# Altium PCB UCC28180_Power Board.PcbDoc
Units mil, origin at the board's own origin, x right, y up, seen from the top; angles counter-clockwise.
Board outline 5050 x 3020 mil, 4 copper layers (Top Layer, Signal Layer 1, Signal Layer 2, Bottom Layer), stack 33.434 mil thick; 57 components, 26 nets, 130 pads, 64 vias.
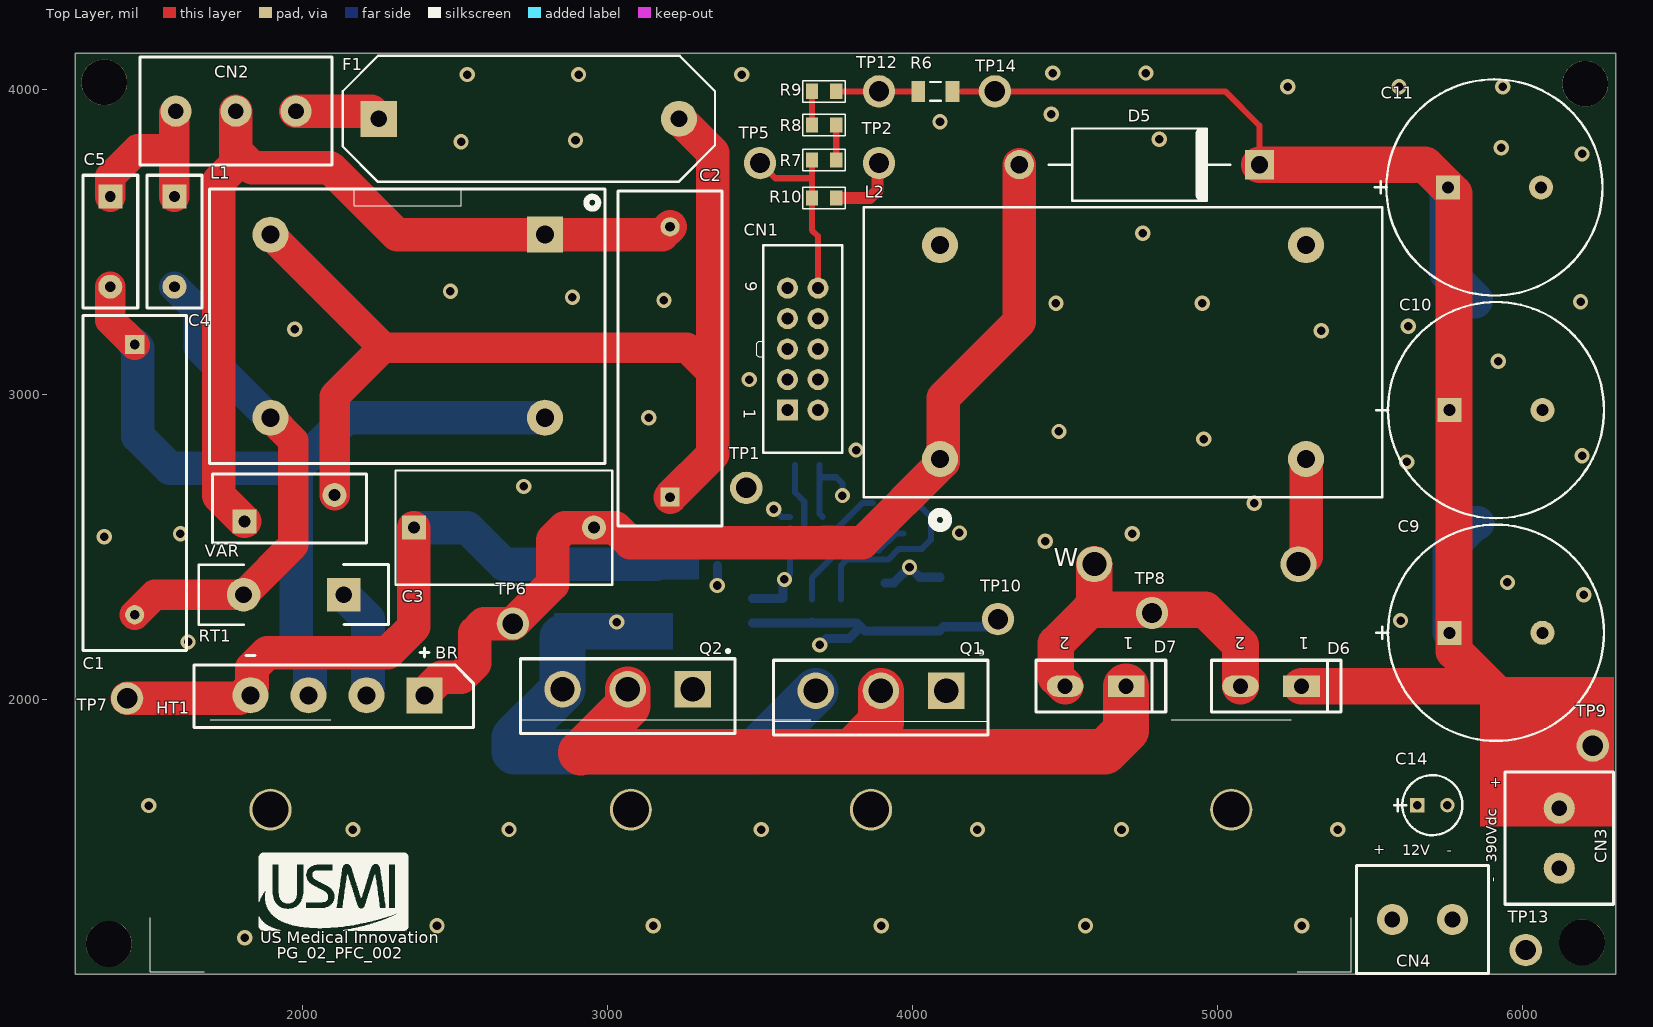
[diagram p0: Top Layer view]
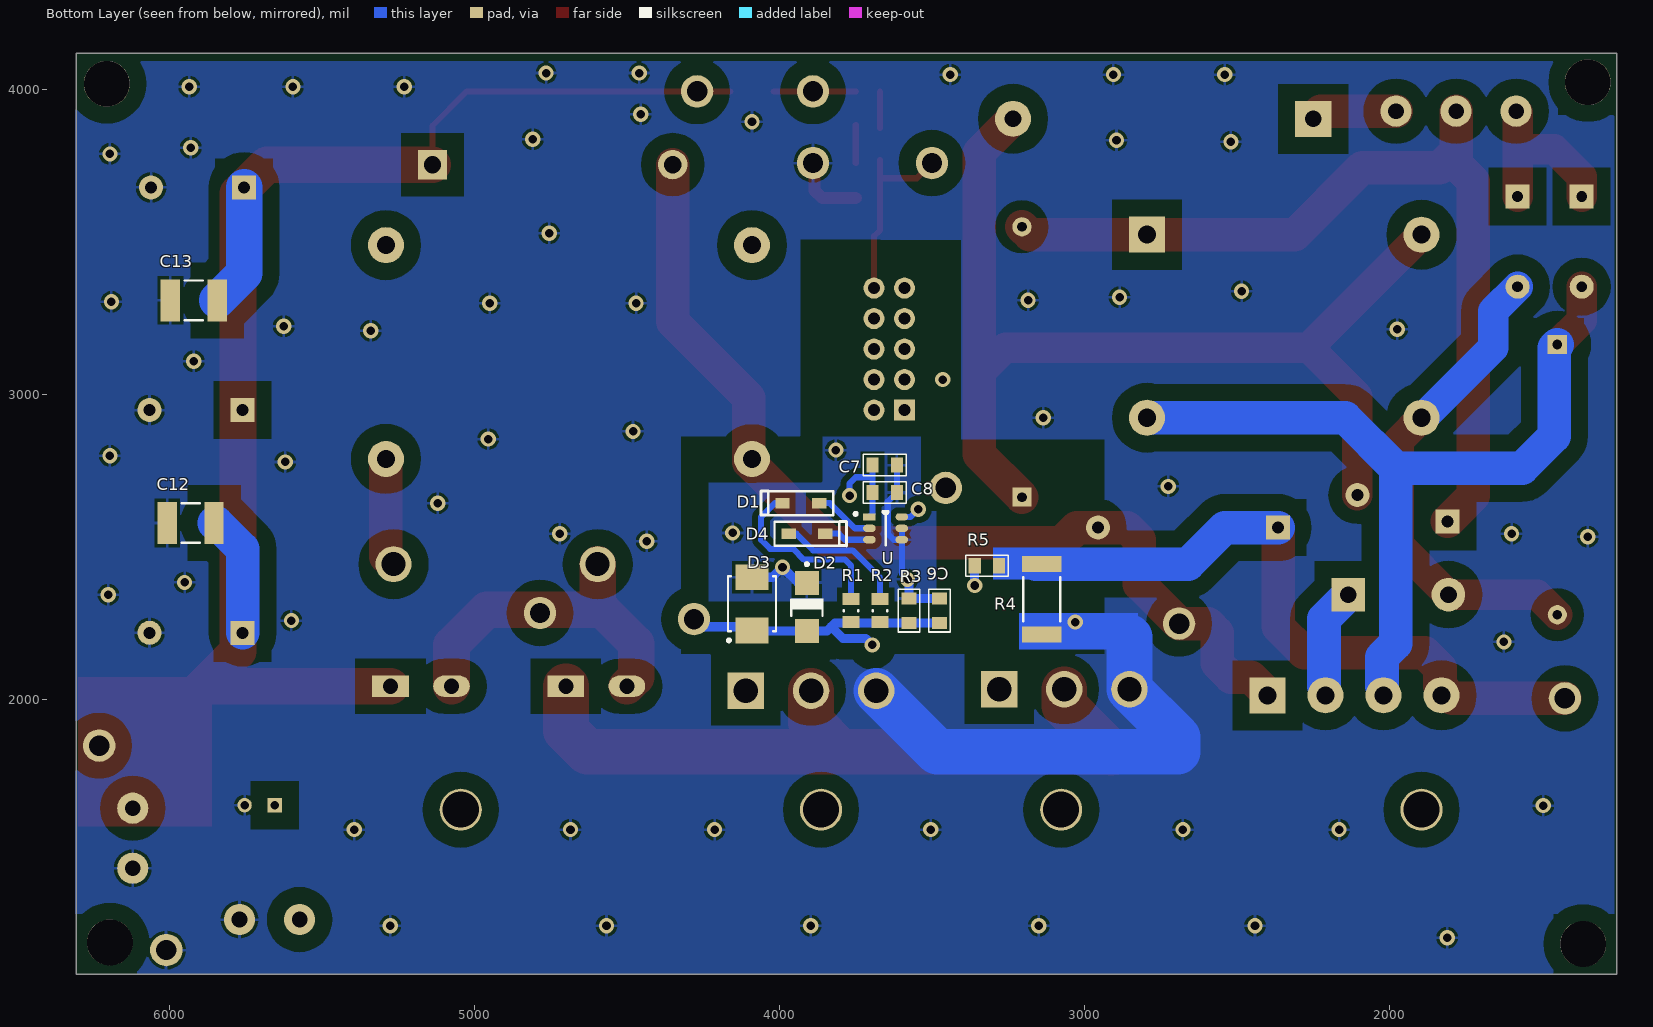
[diagram p1: Bottom Layer view, seen from below]
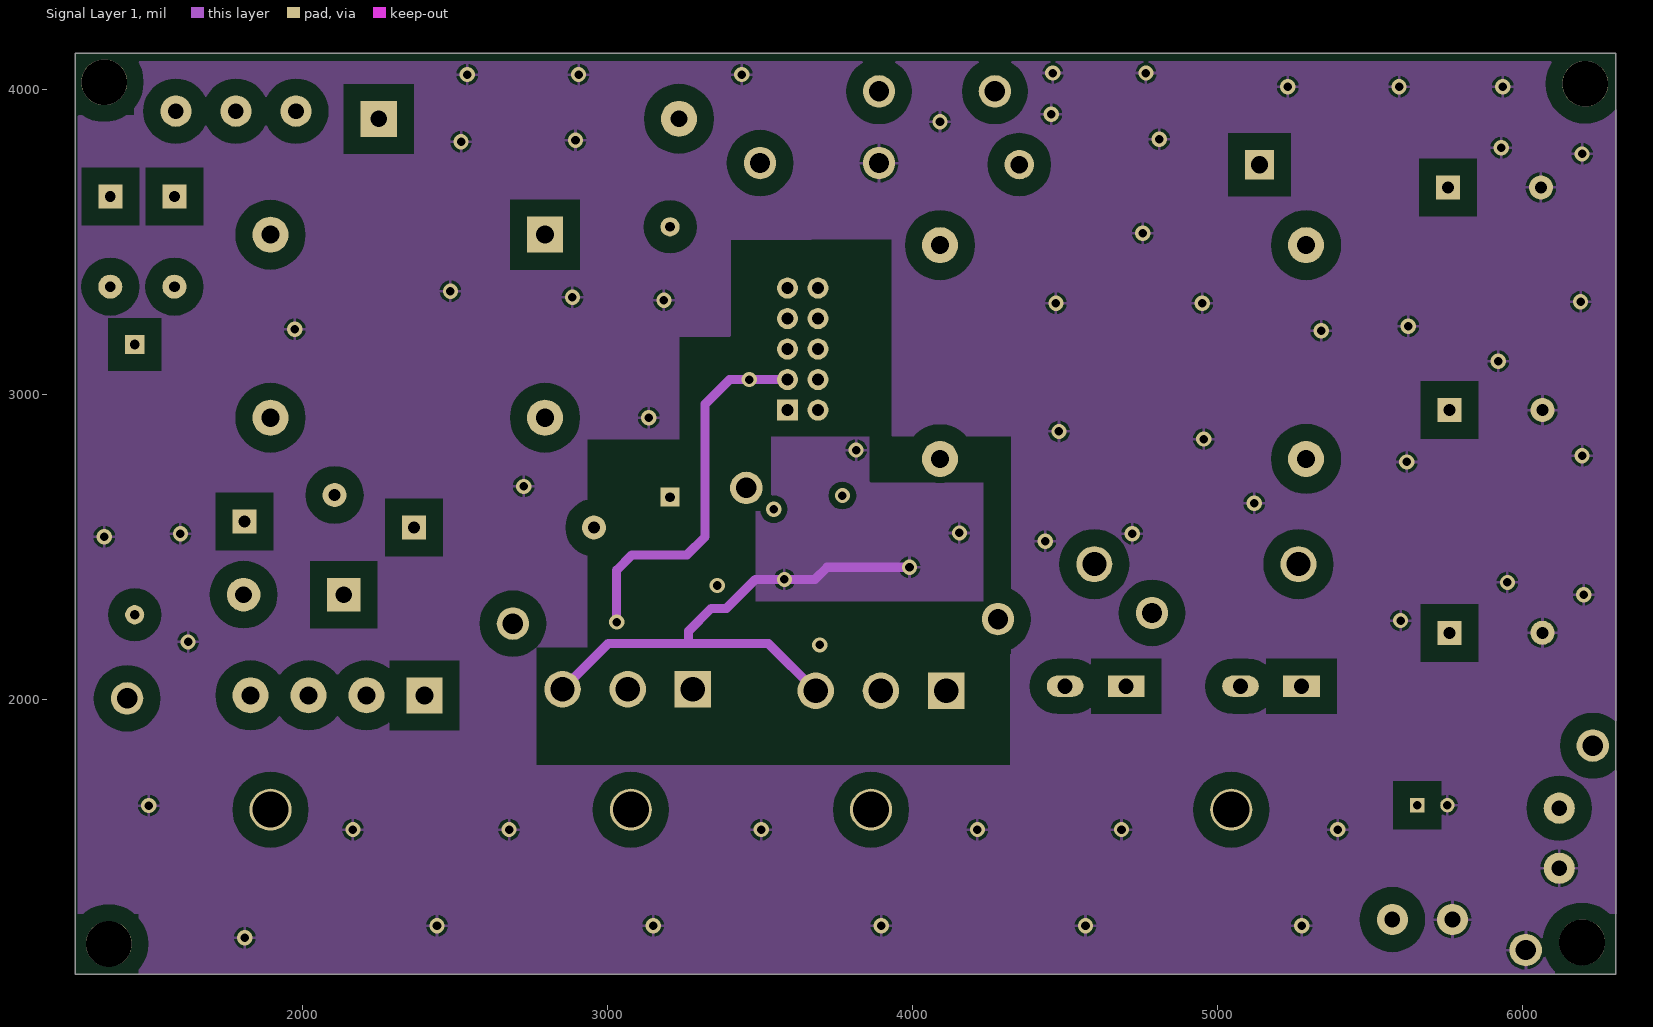
[diagram p2: Signal Layer 1]
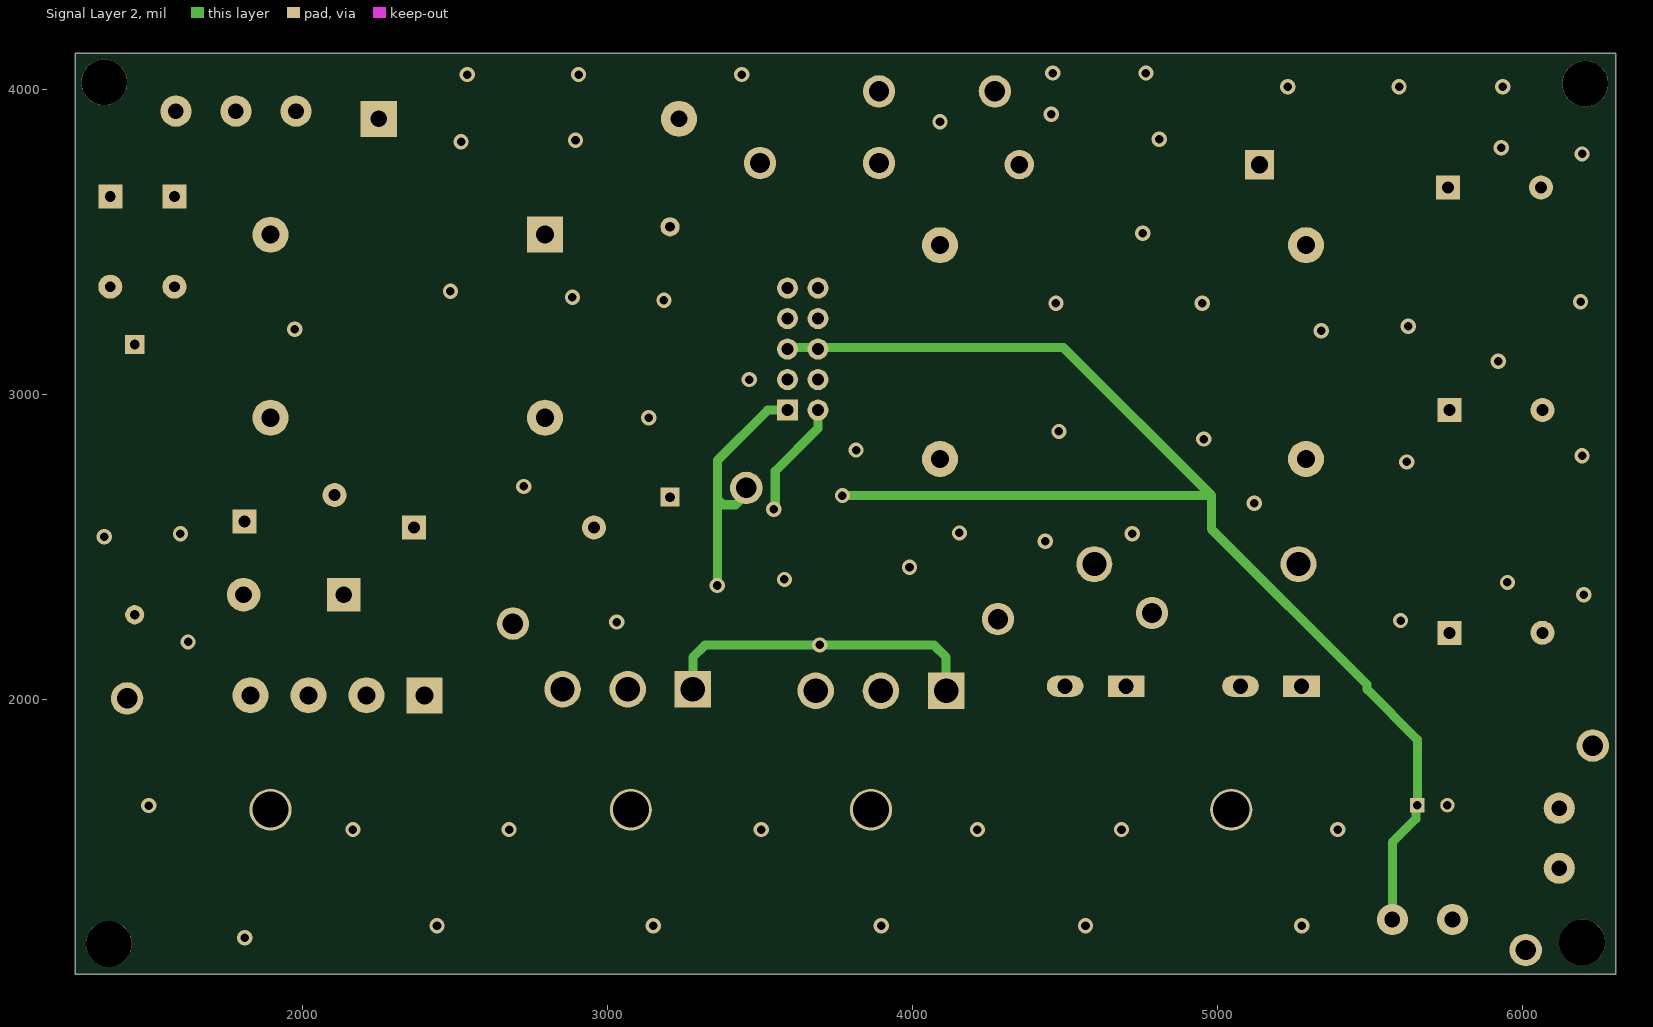
[diagram p3: Signal Layer 2]

## Layer stack, top to bottom
Top Solder: solder mask 0.4, Solder Resist, Dk 3.5
Top Layer: signal copper 2.8
Dielectric 1: core 10, FR-4, Dk 4.2
Signal Layer 1: signal copper 1.417
Dielectric 3: prepreg 5, Dk 4.2
Signal Layer 2: signal copper 1.417
Dielectric 2: core 10, Dk 4.2
Bottom Layer: signal copper 2.8
Bottom Solder: solder mask 0.4, Solder Resist, Dk 3.5

## Board outline
1255,1100 6305,1100 6305,4120 1255,4120

## Design rules (kind name [scope] priority, off if disabled: settings)
Clearance Clearance_3 [InNamedPolygon('GND_L02_P011')] p1: gap=20
Clearance Clearance_2 [InNamedPolygon('Bottom layer-GND3')] p2: gap=20
Clearance [InNamedPolygon('Bottom layer-GND3')] p3: gap=10
Clearance Clearance_1 [All] p4: gap=10 except(55: Arc-Poly Track-Poly SMDPad-Poly THPad-Poly Via-Poly Fill-Poly Poly-Poly)
Clearance "Clearance 2" [All] p5: gap=10 except(20: Arc-Poly Track-Poly SMDPad-Poly THPad-Poly Via-Poly Fill-Poly Poly-Poly)
ComponentClearance [All] p1 off: gap=10 collisioncheckmode=3 verticalgap=10 showdistances=FALSE
PolygonConnect [All] p1: connectstyle=Relief reliefconductorwidth=10 reliefentries=4 polygonreliefangle="90 Angle" airgapwidth=10
RoutingVias [All] p1: holewidth=28 width=50 viastyle="Through Hole" minholewidth=28 minwidth=50 maxholewidth=28 maxwidth=50
SolderMaskExpansion [All] p1: expansion=4
Width [All] p1: maxlimit=300 minlimit=10 preferedwidth=10
29 further rules are at their usual default settings.

## Classes and differential pairs
component class "Boosting Stage": C9 C10 C11 C12 C13 C14 CN3 CN4 D5 D6 D7 HT1 L2 Q1 Q2 R4 R5 R6 R7 R8 R9 R10 TP8 TP9 TP10 TP12 TP13 TP14 W
component class "Driving Stage": C6 C7 C8 D1 D2 D3 D4 R1 R2 R3 U
component class "Filtering Stage": BR C1 C2 C3 C4 C5 CN2 F1 L1 RT1 TP6 TP7 VAR
component class "Top Sheet_Power System": CN1 TP1 TP2 TP5

## Components (designator, comment, footprint, x,y, rotation, side; value= is the part's Value field where it differs from the comment)
BR "GBU8J-BP" GBU8J 2400,2015 r180 top (schematic designator BR1)
C1 "ECQ-U2A474ML" ECQ-U2A474ML 1450,3165 r270 top
C2 "ECQ-U2A474ML" ECQ-U2A474ML 3205,2665 r90 top
C3 "ECQ-U2A334ML" CAPFILM0.33U 2365,2565 r0 top
C4 "CS11-E2GA222MYNS" CS11-E2GA222MYNS 1580,3650 r270 top
C5 "CS11-E2GA222MYNS" CS11-E2GA222MYNS 1370,3650 r270 top
C6 "C0805C102J5GACTU" CAP0805_NEW 3475,2292.6 r270 bottom (schematic designator C1)
C7 "CC0805JKX7R9BB105" CAP0805_NEW 3655,2770 r0 bottom (schematic designator C2)
C8 "C0805C104J5RACAUTO" CAP0805_NEW 3655,2680 r0 bottom (schematic designator C3)
C9 "450QXW120MEFC18X31.5" 450QXW120MEFC18X31.5 5760,2220 r0 top (schematic designator C6)
C10 "450QXW120MEFC18X31.5" 450QXW120MEFC18X31.5 5760,2950 r0 top locked (schematic designator C7)
C11 "450QXW120MEFC18X31.5" 450QXW120MEFC18X31.5 5755,3680 r0 top (schematic designator C8)
C12 "GRM43DR72J104KW01L" CAP1812 5930,2580 r180 bottom (schematic designator C9)
C13 "GRM43DR72J104KW01L" CAP1812 5920,3310 r180 bottom (schematic designator C11)
C14 "ECA-1VM470" CAPALUM47U 5655,1655 r0 top (schematic designator C10)
CN1 "MSPV10-ND" MSV10-ND 3640,3150 r270 top
CN2 "1935789" CONN_1935789 1585,3930 r0 top
CN3 "1935776" CONN_1935776 6120,1645 r270 top
CN4 "1935776" CONN_1935776 5770,1280 r180 top
D1 "DB2W40300L" Mini2-F3-B 3930,2645 r0 bottom
D2 "1SMA12CAT3G" ONSC-SMA-2-403D-02_F_V 3910,2305 r270 bottom
D3 "1SMB5927BT3G" ONSC-SMB-2-403A-03_H_V 4090,2315 r90 bottom
D4 "DB2W40300L" Mini2-F3-B 3910,2545 r180 bottom
D5 "1N5406RLG" 1N5406-DO201AD 4350,3755 r0 top (schematic designator D1)
D6 "C3D04060A" C3D04060A 5275,2045 r180 top (schematic designator D2)
D7 "C3D04060A" C3D04060A 4700,2045 r180 top locked (schematic designator D3)
F1 "FUSE" 0031.8211 2250,3905 r0 top
HT1 "HT_78245" HT-78245 3470,1640 r0 top
L1 "8113-RC" 8113-RC 2345,3225 r180 top
L2 "51-1785LF" G-51-185LF 4090,2790 r0 top
Q1 "C3M0065090D" TO-247-3 4110,2030 r180 top
Q2 "C3M0065090D" TO-247-3 3280,2035 r180 top
R1 "CRCW0805R10" RES0805 3765,2292.6 r90 bottom
R2 "CRCW0805R4.99" RES0805 3670,2292.6 r90 bottom
R3 "TNPW080510K0FEEA" RES0805_New 3575,2292.6 r90 bottom
R4 "CRCW2512R0.027" RES2512 3140,2330 r90 bottom (schematic designator R1)
R5 "RC0805FR-07221RL" RES0805_New 3320,2440 r0 bottom (schematic designator R2)
R6 "CRCW120649R9FKEA" RES1206 4075,3995 r180 top (schematic designator R3)
R7 "CRCW0805340KFKEA" RES0805_New 3710,3770 r180 top (schematic designator R4)
R8 "CRCW0805332KFKEA" RES0805_New 3710,3885 r0 top (schematic designator R5)
R9 "CRCW0805332KFKEA" RES0805_New 3710,3995 r180 top (schematic designator R6)
R10 "RC0805FR-0713KL" RES0805_New 3710,3645 r0 top (schematic designator R7)
RT1 "CL-40" CL-40 2135,2345 r180 top
TP1 "5006" "Test Point" 3455,2695 r0 top
TP2 "5006" "Test Point" 3890,3760 r0 top
TP5 "5006" "Test Point" 3500,3760 r0 top
TP6 "5006" "Test Point" 2690,2250 r0 top
TP7 "5006" "Test Point" 1425,2005 r0 top
TP8 "5006" "Test Point" 4785,2285 r0 top
TP9 "5006" "Test Point" 6230,1850 r0 top
TP10 "5006" "Test Point" 4280,2265 r90 top
TP12 "5006" "Test Point" 3890,3995 r90 top
TP13 "5006" "Test Point" 6010,1180 r90 top
TP14 "5006" "Test Point" 4270,3995 r90 top
U "UCC27511DBV" SOP6 3705,2600 r180 bottom (schematic designator U1)
VAR "S10K275E2" S10K275E2 1810,2585 r0 top (schematic designator VAR1)
W "Wire" "Current Sense Wire" 5265,2445 r180 top (schematic designator W1)

## Footprints (in the part's own frame and the unit in brackets; to place one, negate y for a bottom-side part, rotate by r counter-clockwise, add the part's x,y. Pads: shape width x height; smd on the part's side, far side on the other; paste and mask are expansions set on the pad)
1N5406-DO201AD [mm] "Diode"
  rect 2.45x2.45 hole 1.45: 1(20,0)
  round 2.45 hole 1.45: 2(0,0)
  silkscreen extent 2.45,-3 17.55,3
0031.8211 [mm] "Fuse Holder"
  rect 3x3 hole 1.4: 1(0,0)
  round 3 hole 1.4: 2(25,0)
  silkscreen extent -3,-5.25 28,5.25, body extent 0.8,-4.62 24.9,4.98, height 11.51
450QXW120MEFC18X31.5 [mm] "Radial Electrolytic Capacitor"
  rect 2x2 hole 1: 1(0,0)
  round 2 hole 1: 2(7.75,0)
  silkscreen extent -6.1,-9 12.87,9, body extent -5.24,-9.25 12.96,8.94, height 39.75
8113-RC [mm] "EMI Choke"
  rect 3x3 hole 1.5: 1(-11.43,-7.62)
  round 3 hole 1.5: 2(-11.43,7.62) 3(11.43,7.62) 4(11.43,-7.62)
  silkscreen extent -16.43,-11.43 16.51,11.43
C3D04060A [mil] "Schotky diode"
  rect 120x69.69 hole 50: 1(0,0)
  oval 120x69.69 hole 50: 2(200,0)
  silkscreen extent -130,-85 295,85
CAP0805_NEW [mil] "SMD_Capacitor"
  rect 40x50 smd: 1(-40,0) 2(40,0)
  silkscreen extent -70,-35 70,35, body extent -41,-25 40,25, height 26
CAP1812 [mm] "Capacitor"
  rect 1.6x3.5 smd: 1(-1.95,0) 2(1.95,0)
  silkscreen extent -0.75,-1.65 0.75,1.65, body extent -2.4,-1.75 2.4,1.75, height 0.7
CAPALUM47U [mm] "Aluminum Capacitor"
  rect 1.2x1.2 hole 0.7: 1(0,0)
  round 1.2 hole 0.7: 2(2.5,0)
  silkscreen extent -1.93,-2.5 3.75,2.5, body extent -1.38,-2.54 3.82,2.66, height 11.5
CAPFILM0.33U [mm] "Film Capacitor"
  rect 2x2 hole 1: 1(0,0)
  round 2 hole 1: 2(15,0)
  silkscreen extent -1.52,-4.75 16.51,4.75
CL-40 [mm] "NTC Thermistor"
  rect 2.8x2.8 hole 1.4: 1(0,0)
  round 2.8 hole 1.4: 2(8.33,0)
  silkscreen extent -3.75,-2.5 12.08,2.5
CONN_1935776 [mm] "2 Pin Connector"
  round 2.6 hole 1.3: 1(0,0) 2(5,0)
  silkscreen extent -3,-4.5 8,4.5, body extent -3.2,-5.2 7.4,4.6, height 13.81
CONN_1935789 [mm] "3 Pin Connector"
  round 2.6 hole 1.3: 1(0,0) 2(5,0) 3(10,0)
  silkscreen extent -3,-4.5 13,4.5
CS11-E2GA222MYNS [mm] "Disc Cap"
  rect 2x2 hole 0.9: 1(0,0)
  round 2 hole 0.9: 2(7.5,0)
  silkscreen extent -1.78,-2.29 9.27,2.29
"Current Sense Wire" [mm]
  round 3 hole 2: 1(0,0) 2(17,0)
ECQ-U2A474ML [mm] "Film Capacitor"
  rect 1.6x1.6 hole 0.8: 1(0,0)
  round 1.6 hole 0.8: 2(22.5,0)
  silkscreen extent -2.41,-4.32 25.49,4.32
G-51-185LF [mm] "Gowanda Inductor"
  round 3 hole 1.5: 1(0,0) 2(30.48,0) 3(30.48,17.8) 4(0,17.8)
  silkscreen extent -6.35,-5.71 36.83,20.95
GBU8J [mm] "Bridge rectifier"
  rect 3x3 hole 1.5: 1(0,0)
  round 3 hole 1.5: 2(4.83,0) 3(9.66,0) 4(14.49,0)
  silkscreen extent -4.06,-3.94 19.18,2.67
HT-78245 [mm] "Aavid Thermalloy Heatsink"
  round 3.5 hole 3: 1(-40,0) 2(-10,0) 3(10,0) 3(40,0)
  silkscreen extent -50,-13.5 50,7.5
Mini2-F3-B [mm] "Schottky Diode"
  rect 1.2x0.85 smd: 1(1.525,0) 3(-1.525,0)
  silkscreen extent -2.7,-1.02 3.3,1
MSV10-ND [mm] "CONN SOCKET PCB VERT 10POS .1"
  rect 1.75x1.75 hole 1: 1(5.08,-1.27)
  round 1.75 hole 1: 2(5.08,1.27) 3(2.54,-1.27) 4(2.54,1.27) 5(0,-1.27) 6(0,1.27) 7(-2.54,-1.27) 8(-2.54,1.27) 9(-5.08,-1.27) 10(-5.08,1.27)
  silkscreen extent -8.64,-3.81 8.64,3.3
ONSC-SMA-2-403D-02_F_V [mm] "Molded, 2-Leads, Body 4.32x2.6mm"
  rect 2x2 smd: 1(-2,0) 2(2,0)
  silkscreen extent -3.67,-1.3 0.74,1.3, body extent -2.16,-1.3 2.16,1.3, height 2.2
ONSC-SMB-2-403A-03_H_V [mil] "Molded, 2-Leads, Body 4.6x3.95mm"
  rect 85x107.99 smd: 1(-87.01,0) 2(87.01,0)
  silkscreen extent -125,-79 91,81, body extent -91,-78 91,78, height 95
RES0805 [mm]
  rect 1x1.4 smd: 1(-0.95,0) 2(0.95,0)
  silkscreen extent -0.05,-0.6 0.05,0.6, body extent -1.1,-0.7 1.1,0.7, height 0.5
RES0805_New [mil] "SMD_Resistor"
  rect 40x50 smd: 1(-40,0) 2(40,0)
  silkscreen extent -70,-35 70,35, body extent -41,-25 40,25, height 27
RES1206 [mm]
  rect 1.15x1.75 smd: 1(-1.425,0) 2(1.425,0)
  silkscreen extent -0.45,-0.77 0.45,0.77, body extent -1.65,-0.87 1.65,0.87, height 0.5
RES2512 [mm]
  rect 1.35x3.3 smd: 1(-2.925,0) 2(2.925,0)
  silkscreen extent -1.85,-1.55 1.85,1.55, body extent -3.25,-1.65 3.25,1.65, height 0.7
S10K275E2 [mm] "Varistor"
  rect 2x2 hole 1: 1(0,0)
  round 2 hole 1: 2(7.5,2.2)
  silkscreen extent -2.67,-1.78 10.16,3.94
SOP6 [mm]
  rect 1.05x0.6 smd: 1(0,0)
  oval 1.05x0.6 smd: 2(0,-0.95) 3(0,-1.9) 4(2.7,-1.9) 5(2.7,-0.95) 6(2.7,0)
  silkscreen extent -1.27,-2.38 1.59,0.48, body extent 0.67,-2.34 2.02,0.46, height 2
"Test Point" [mm] "Test Point"
  round 2.7 hole 1.7: 1(0,0)
  body extent -1.63,-1.5 1.55,1.68, height 5.49
TO-247-3 [mm] "Transistor"
  rect 3.04x3.04 hole 2.03: 1(0,0)
  round 3.04 hole 2.03: 2(5.43,0) 3(10.86,0)
  silkscreen extent -3.5,-3.3 14.36,3.68

## Part data
BR: "RECT BRIDGE GPP 8A 600V GBU"
C1 C2: "CAP FILM 0.47UF 20% 275VAC RAD"
C3: "CAP FILM 0.33UF 20% 275VAC RAD"
C4 C5: "CAP CER 2200PF 250VAC RADIAL"
C6: "CAP CER 1000PF 50V C0G/NP0 0805"
C7: "CAP CER 1UF 50V X7R 0805"
C8: "CAP CER 0.1UF 50V X7R 0805"
C12 C13: "CAP CER 0.1UF 630V X7R 1812"
C14: "CAP ALUM 47UF 20% 35V RADIAL"
CN1: "CONN SOCKET PCB VERT 10POS .1\""
CN2: "CONN TERM BLOCK 3POS 5.0MM"
CN3 CN4: "CONN TERM BLOCK 2POS 5.0MM"
D2: "400 W Peak Power Zener Transient Voltage Suppressor, 2-Pin SMA, Pb-Free, Tape and Reel"
D3: "3 W Zener Voltage Regulator, 2-Pin SMB, Pb-Free, Tape and Reel"
D5: "DIODE GEN PURP 600V 3A DO201AD"
D6 D7: "DIODE SCHOTTKY 600V 4A TO220-2"
L1: "CMC 5MH 8.9A 2LN TH"
Q1 Q2: "MOSFET N-CH 900V 36A TO247-3"
R3: "RES 10K OHM 1% 1/5W 0805"
R5: "RES SMD 221 OHM 1% 1/8W 0805"
R6: "RES SMD 49.9 OHM 1% 1/4W 1206"
R7: "RES SMD 340K OHM 1% 1/8W 0805"
R8 R9: "RES SMD 332K OHM 1% 1/8W 0805"
R10: "RES SMD 13K OHM 1% 1/8W 0805"
RT1: "ICL 5 OHM 25% 6A 19.56MM"
TP1 TP2 TP5 TP6 TP7 TP8 TP9 TP10 TP12 TP13 TP14: "TEST POINT PC COMPACT .063\"D BLK"
VAR: "VARISTOR 430V 3.5KA DISC 10MM"

## Free pads (board coordinates)
  round 150 hole 150: 1(1350,4025) 2(1365,1200) 3(6195,1205) 4(6205,4020)

## Via types
v1: diameter 50, hole 28, Top Layer to Bottom Layer, tented both sides, 64 vias

## Nets (pads, with @x,y where several pads share a name; then routed paths per layer and width w, separated by ;. In a path a pad name is that pad's centre, name@x,y a point inside that pad or via, vN(x,y) a via of type N, cw(c..) or ccw(c..) an arc to the next point about the centre after c; other vN are vias at no path point)
EARTH: C4.1 C5.1 CN2.1 | length 594.4
  Top Layer w100: C5.1 1370,3715 1460,3805 1580,3805 ; C4.1 1580,3805 ; CN2.1 1580,3925 1580,3805
GND: C6.1 C7.1 C8.1 C9.2 C10.2 C11.2 C12.1 C13.1 C14.2 CN1.3 CN3.2 CN4.1 D2.1 D3.2 Q1.3 Q2.3 R3.2 R4.1 R10.2 TP2.1 TP13.1 U.4 U.5 | length 5644.9
  Top Layer w40: R10.2 3860,3645 3885,3670 TP2.1@3885,3760
  Signal Layer 1 w30: Q2.3 3002.44,2185 3265.71,2185 ; v1(3030,2255) 3030,2425 3080,2475 3260,2475 3320,2535 3320,2970 3400,3050 v1(3465,3050) CN1.3 ; Q1.3 3527.44,2185 3265.71,2185 ; v1(3990,2435) 3720,2435 3680,2395 v1(3580,2395) 3485,2395 3390,2300 3340,2300 3265.71,2225.71 3265.71,2185
  Bottom Layer w20: v1(3580,2395) 3598.7,2413.7 U.4 ; U.5 U.4 ; C7.1 C8.1 3645,2650 3645,2545 3625.2,2525.2 U.4
  Bottom Layer w30: C6.1 R3.2 3575,2390 v1(3580,2395) ; D2.1 3938.74,2383.74 v1(3990,2435) 4022.99,2402.01 D3.2
  Bottom Layer w150: 2852.44,2205.71 Q2.3 2695,1877.56 2695,1830 3482.44,1830 Q1.3
  other v1: 1811.02,1220.47 2440.94,1259.84 3149.61,1259.84 3897.64,1259.84 4566.93,1259.84 5275.59,1259.84 2165.35,1574.8 2677.17,1574.8 3503.94,1574.8 4212.6,1574.8 4685.04,1574.8 5393.7,1574.8 1496.06,1653.54 1625,2190 5600,2260 6200,2345 5950,2385 4435,2520 1350,2535 1600,2545 4720,2545 4153.54,2547.24 5120,2645 2725,2700 5620,2780 6195,2800 3814.96,2818.9 4955,2855 4480,2880 3135,2925 5920,3110 5340,3210 1975,3215 5625,3225 4470,3300 4950,3300 6190,3305 3185,3310 2885,3320 2485,3340 4755,3530 6195,3790 5930,3810 2520,3830 2895,3835 4808.9,3837.85 4090,3895 4455,3920 5230,4010 5595,4010 5935,4010 2540,4050 2905,4050 3440,4050 4460,4055 4765,4055
LINE: CN2.3 F1.1 | length 281.7
  Top Layer w110: CN2.3 2225,3930 F1.1
NetBR_1: BR.1 C3.2 D5.2 L2.1 TP6.1 | length 3283.3
  Top Layer w110: BR.1 2400,2020 2455,2075 2520,2075 2565,2120 2565,2220 2595,2250 TP6.1 2820,2380 2820,2525 2860,2565 C3.2 3025,2565 3075,2515 3835,2515 4100,2780 4100,2990 4350,3240 D5.2
NetBR_2: BR.2 RT1.1 | length 333.1
  Bottom Layer w110: RT1.1 2214.84,2265.16 BR.2@2214.84,2045
NetBR_3: BR.3 C1.1 C5.2 L1.2 | length 2707.4
  Top Layer w100: C5.2 1370,3245 C1.1
  Bottom Layer w110: C1.1 1460,3155 1460,2865 1565,2760 1980,2760 ; BR.3@2024.68,2045 2024.68,2140.32 1980,2185 1980,2760 ; L1.2 2145,2925 1980,2760
NetBR_4: BR.4 C3.1 R4.2 R5.1 TP7.1 | length 2241.9
  Top Layer w110: TP7.1 1794.53,2005 1834.53,2045 1834.53,2104.53 1885,2155 2280,2155 2365,2240 C3.1
  Bottom Layer w110: C3.1 2540,2565 2659.84,2445.16 R4.2@3160,2445.16
NetC1_2: C1.2 C4.2 L1.3 RT1.2 | length 1626
  Top Layer w100: C1.2 1515.83,2345 RT1.2 1970,2507.95 1970,2850 L1.3
  Bottom Layer w100: C4.2 1660,3274.72 1660,3155 1890,2925 L1.3
NetC2_1: C2.1 F1.2 L1.4 VAR.2 | length 3524.8
  Top Layer w100: L1.4 2265,3155 ; VAR.2 2105.28,2995.28 2265,3155 ; 3340,3075 3260,3155 2265,3155
  Top Layer w110: C2.1 3345,2805 3345,3794.25 F1.2
NetC6_2: C6.2 D2.2 D3.1 Q1.1 Q2.1 R1.1 R2.1 R3.1 TP10.1 | length 2087.7
  Signal Layer 2 w30: Q2.1@3280,2025 3280,2140 3320,2180 4070,2180 4110,2140 Q1.1@4110,2025
  Bottom Layer w30: C6.2 R3.1 R2.1@3672.6,2252.6 ; R2.1 R2.1@3672.6,2252.6 ; v1(3696.04,2180.14) 3717.5,2201.61 3792.21,2201.61 3830.3,2239.7 ; TP10.1 4255,2240 4102.01,2240 D3.1 4088.27,2226.26 D2.2 3843.74,2226.26 3830.3,2239.7 ; R2.1@3672.6,2252.6 3817.4,2252.6 3830.3,2239.7
NetCN1_1: CN1.1 R5.2 TP1.1 | length 911.1
  Signal Layer 2 w30: v1(3360,2375) 3360,2660 ; TP1.1 3455,2675 3420,2640 3380,2640 3360,2660 ; CN1.1 3525,2950 3360,2785 3360,2660
  Bottom Layer w30: v1(3360,2375) R5.2
NetCN1_2: CN1.2 U.6 | length 447
  Signal Layer 2 w30: v1@3550,2625 3550,2750 3690,2890 CN1.2
  Bottom Layer w20: v1(3545,2625) 3570,2600 U.6
NetCN1_10: CN1.10 R7.2 R10.1 TP5.1 | length 619
  Top Layer w20: TP5.1 3550,3710 3670,3710 ; R7.2 3670,3710 ; CN1.10 3690,3520 3670,3540 R10.1 3670,3710
NetD1_1: D1.1 R1.2 | length 603.8
  Bottom Layer w20: R1.2 3765,2440 3785,2460 3920,2460 3955,2495 4030,2495 4060,2525 4060,2600 4015,2645 D1.1
NetD1_3: D1.3 U.2 | length 199.1
  Bottom Layer w20: U.2 3752.6,2562.6 3835,2645 D1.3
NetD4_1: D4.1 U.3 | length 153.2
  Bottom Layer w20: U.3 3785.2,2525.2 3805,2545 D4.1
NetD4_3: D4.3 R2.2 | length 430.1
  Bottom Layer w20: R2.2 3670,2400 3760,2490 3890,2490 3945,2545 D4.3
NetD6_2: D6.2 D7.2 TP8.1 W.2 | length 1142.1
  Top Layer w120: D7.2 4470,2075 4470,2185 4595.71,2310.71 W.2 ; 4580,2295 4960,2295 5075,2180 D6.2
NetD7_1: D7.1 Q1.2 Q2.2 | length 2455
  Top Layer w150: 2912.5,1827.5 3066.22,1981.22 Q2.2 ; 2930,1830 3800,1830 ; Q1.2 3896.22,1926.22 3800,1830 ; D7.1 4700,1900 4630,1830 3800,1830
NetL2_2: L2.2 W.1 | length 350.4
  Top Layer w110: W.1 5290,2470 L2.2@5290,2785
NetR6_2: R6.2 R9.1 TP12.1 | length 268.9
  Top Layer w20: R9.1 R6.2
NetR7_1: R7.1 R8.2 | length 125
  Top Layer w20: R7.1@3750,3760 R8.2
NetR8_1: R8.1 R9.2 | length 120
  Top Layer w20: R8.1@3670,3875 R9.2
NEUTRAL: C2.2 CN2.2 L1.1 VAR.1 | length 2950.7
  Top Layer w110: CN2.2 1781.85,3798.15 ; VAR.1 1725,2670 1725,3700 1781.85,3756.85 1781.85,3798.15 ; C2.2 3179.17,3525 L1.1 2310,3525 2090,3745 1835,3745 1781.85,3798.15
VCC: C7.2 C8.2 C14.1 CN1.5 CN1.6 CN4.2 U.1 | length 4804.7
  Signal Layer 2 w30: CN1.5@3580,3155 4495,3155 4980,2670 ; v1(3770,2670) 4980,2670 ; CN4.2 5573.15,1533.15 5650,1610 C14.1@5650,1650 ; C14.1 5655,1870 5490,2035 5490,2050 4980,2560 4980,2670
  Bottom Layer w20: C7.2 3695,2730 ; U.1 3695,2610 C8.2 3695,2730 ; v1(3770,2670) 3770,2710 3750,2730 3695,2730
VOUT: C9.1 C10.1 C11.1 C12.2 C13.2 CN3.1 D5.1 D6.1 R6.1 TP9.1 TP14.1 | length 5411.4
  Top Layer w20: 4160,3995 5025,3995 5137.4,3882.6 D5.1
  Top Layer w120: D5.1 5680,3755 C11.1 5775,3660 5775,2160 5890,2045 ; D6.1 5890,2045 ; CN3.1 6120,1815 5890,2045
  Bottom Layer w110: C9.1 5760,2495 5845,2580 C12.2
  Bottom Layer w120: C11.1 5755,3398.23 C13.2
pads on no net: CN1.4 CN1.7 CN1.8 CN1.9 HT1.1 HT1.2 HT1.3 L2.3 L2.4

## Polygon pours and split planes (outlines as drawn)
GND on Bottom Layer "Bottom layer-GND1" (solid, pour order 13): 1448.43,4094.15 3668.5,4094.15 3668.42,3509.18 3403.51,3509.18 3403.51,2853.78 3047.18,2853.78 2985.75,2853.78 2955.54,2853.78 2933.51,2853.78 2933.51,2149.18 4353.51,2149.18 4353.51,1099.18 1463.51,1099.18 1463.51,1299.18 1263.51,1299.18 1262.99,3916.59 1308.65,3916.59 1353.91,3916.59 1448.43,3916.59
GND on Bottom Layer "Bottom layer-GND3" (solid, pour order 19): 3537.15,2862.2 3694.38,2862.2 3858.27,2862.2 3858.27,2716.54 3862.2,2712.6 4232.28,2712.6 4232.28,2322.83 3485.9,2322.83 3485.9,2618.11 3503.94,2618.11 3537.15,2636.9 3537.15,2750.88
GND on Bottom Layer "Bottom layer-GND 2" (solid, pour order 17): 3664.96,4094.15 3664.96,3509.96 3932.2,3509.18 3932.2,2865.5 3933.51,2864.18 4323.51,2864.18 4323.51,2149.18 4353.51,2149.18 4353.51,1099.18 4354.06,1098.64 6105.72,1098.64 6105.72,1298.23 6308.62,1298.34 6308.62,3936.08 6105.88,3936.16 6105.72,4094.15
GND on Signal Layer 1 "GND_L02_P011" (solid, pour order 11): 3537.15,2862.2 3694.38,2862.2 3858.27,2862.2 3858.27,2716.54 3862.2,2712.6 4232.28,2712.6 4232.28,2322.83 3485.9,2322.83 3485.9,2618.11 3503.94,2618.11 3537.15,2636.9 3537.15,2750.88
GND on Signal Layer 1 "Signal layerGND1" (solid, pour order 23): 1448.43,4094.15 3668.5,4094.15 3668.42,3509.18 3403.51,3509.18 3403.51,2853.78 3047.18,2853.78 2985.75,2853.78 2955.54,2853.78 2933.51,2853.78 2933.51,2149.18 4353.51,2149.18 4353.51,1099.18 1463.51,1099.18 1463.51,1299.18 1263.51,1299.18 1262.99,3916.59 1308.65,3916.59 1353.91,3916.59 1448.43,3916.59
GND on Signal Layer 1 "Signal lyer 1-GND 2" (solid, pour order 25): 3664.96,4094.15 3664.96,3509.96 3932.2,3509.18 3932.2,2865.5 3933.51,2864.18 4323.51,2864.18 4323.51,2149.18 4353.51,2149.18 4353.51,1099.18 4354.06,1098.64 6105.72,1098.64 6105.72,1298.23 6308.62,1298.34 6308.62,3936.08 6105.88,3936.16 6105.72,4094.15

## Other copper
Top Layer:
  rectangle net VOUT: 5860,1585 6300,2075
Signal Layer 1:
  pour cut-out: 3400,3190.04 3235.04,3190.04 3235,3190 3235,2755 3400,2755
  pour cut-out: 2766.71,2173.29 4318.29,2173.29 4320,2175 4320,1785 2765,1785 2766.71,1786.71
Bottom Layer:
  rectangle net GND: 2825,2165 3215,2285
  rectangle net NetBR_4: 3155,2395 3300,2500

## Silkscreen, mask and mechanical layers (free items; w line width, h text height)
Top Overlay:
  drawing of 1445 lines, arcs and shapes, not listed
  text "+" at 5892.22,1702.37 h60
  text "+" at 5510.27,1482.24 h60
  text "12V" at 5605,1479.28 h60
  text "-" at 5750.54,1478.71 h60
  text "390Vdc" at 5926.62,1466.94 h60 r90
  text "-" at 5930.61,1402.12 h60 r90
  text "US Medical Innovation" at 1861.82,1188.71 h65
  text "PG_02_PFC_002" at 1915.32,1138.66 h65
Mechanical 10:
  the board outline again, w20

## Text inside footprints (layer, text, board x,y; h text height)
CN1: Top Overlay "9" at 3451,3373 h40 r270; Top Overlay "1" at 3447,2954 h40 r270
D6: Top Overlay "1" at 5300,2205 h40 r180; Top Overlay "2" at 5090,2205 h40 r180
D7: Top Overlay "1" at 4725,2205 h40 r180; Top Overlay "2" at 4515,2205 h40 r180